# Altium PCB USB_UART.PcbDoc
Units mil, origin at the board's own origin, x right, y up, seen from the top; angles counter-clockwise.
Board outline 1133.28 x 826.77 mil, 2 copper layers (Top Layer, Bottom Layer), stack 41.339 mil thick; 7 components, 7 nets, 38 pads, 6 vias.
Unrouted connection lines stored in the file: 1.
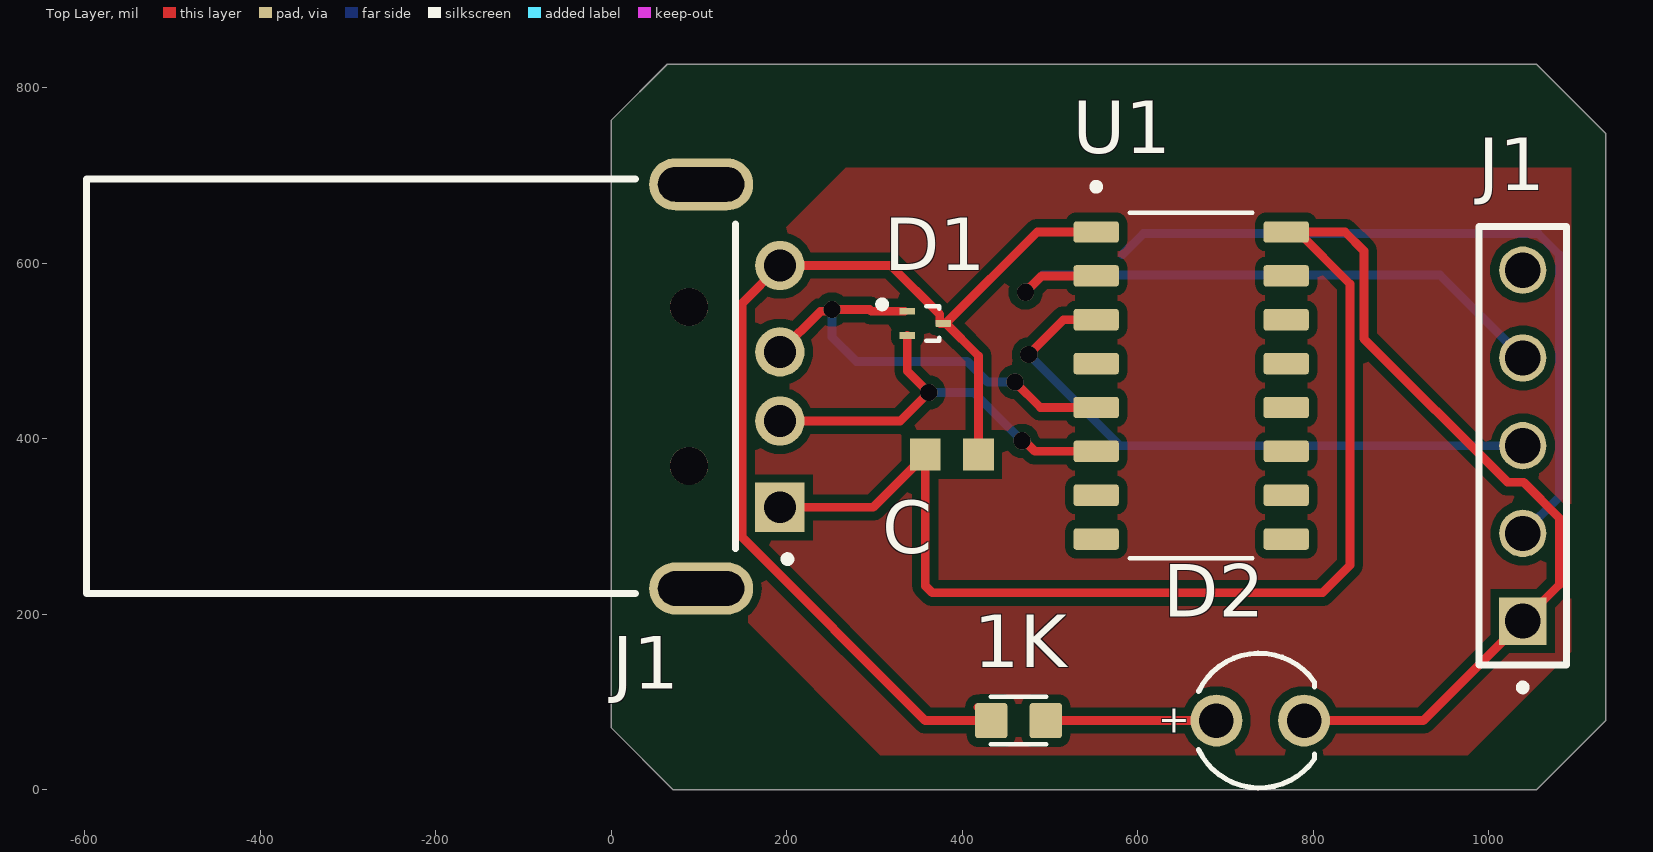
[diagram p0: Top Layer view]
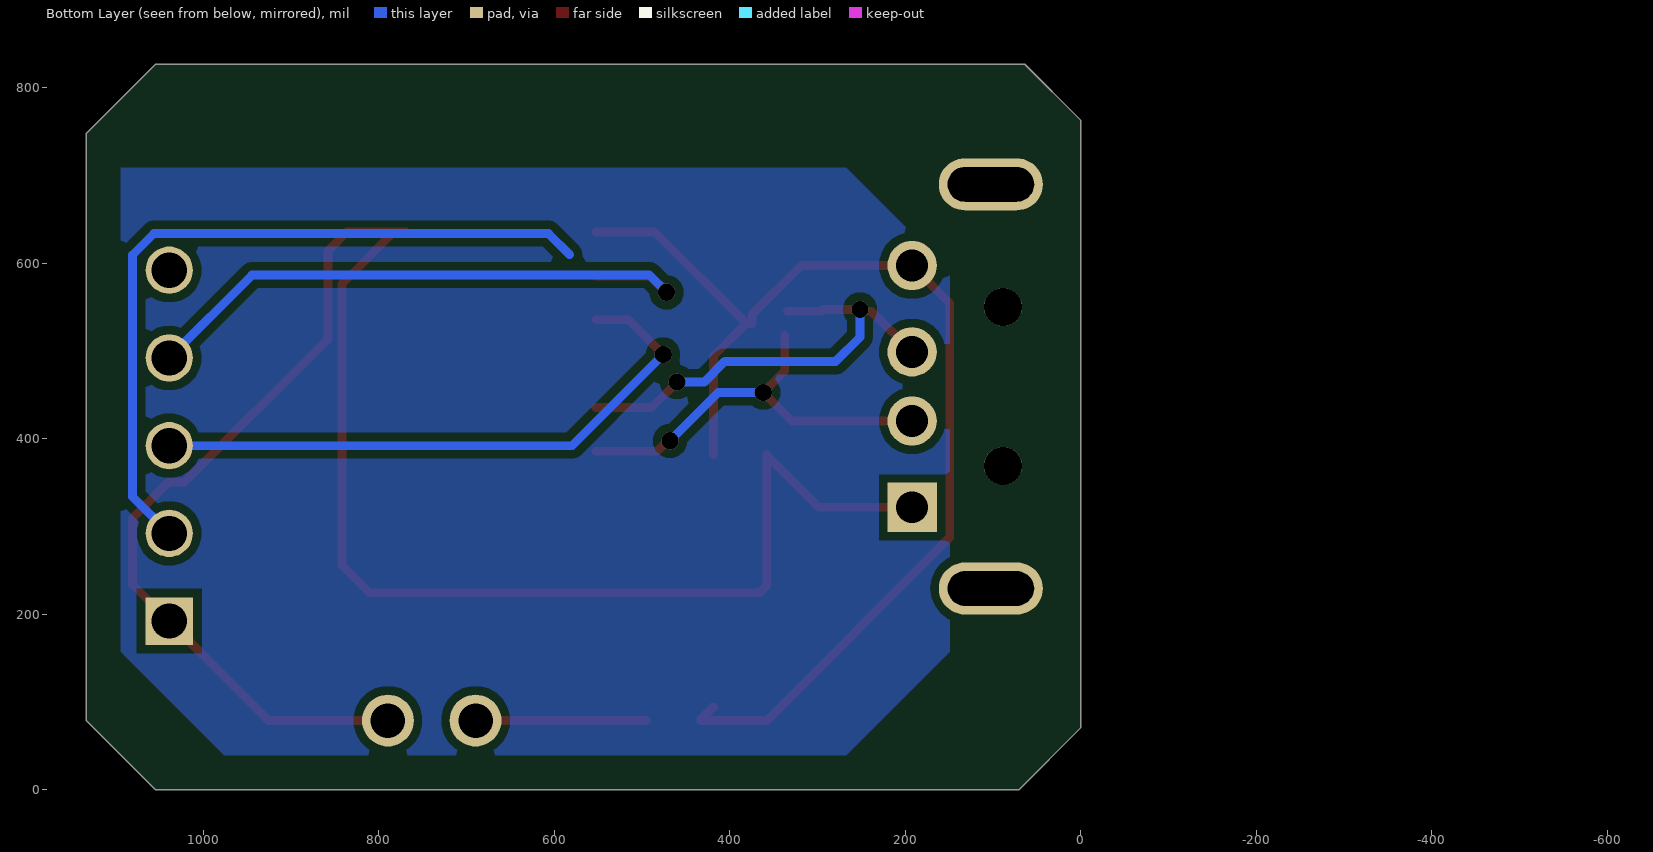
[diagram p1: Bottom Layer view, seen from below]

## Layer stack, top to bottom
Top Solder: solder mask 1.9685, Solder Resist, Dk 3.5
Top Layer: signal copper 3.937
Dielectric 1: dielectric 33.4646, FR-4, Dk 4.8
Bottom Layer: signal copper 3.937
Bottom Solder: solder mask 1.9685, Solder Resist, Dk 3.5

## Board outline
70.48,0 1054.73,0 1133.47,78.74 1133.47,748.03 1054.73,826.77 63.77,826.77 0.19,763.19 0.19,70.29

## Design rules (kind name [scope] priority, off if disabled: settings)
Clearance [All] p1: gap=9.84 ignorepadtopadclearanceinfootprint=FALSE
HoleSize [All] p1: absolutevalues=TRUE maxlimit=100 minlimit=10 maxpercent=80.000 minpercent=20.000
PolygonConnect [All] p1: connectstyle=Relief reliefconductorwidth=10 reliefentries=4 polygonreliefangle="90 Angle" airgapwidth=10
RoutingVias [All] p1: holewidth=19.68 width=19.68 viastyle="Through Hole" minholewidth=19.68 minwidth=19.68 maxholewidth=19.68 maxwidth=19.68
SolderMaskExpansion [All] p1: expansion=4 istentingtop=FALSE
Width Width_1 [All] p1: maxlimit=10 minlimit=6 preferedwidth=10 minimp=50.000000 maximp=50.000000 favimp=50.000000
Width Data_line [(InNet('D+') OR InNet('D-'))] p2: maxlimit=8 minlimit=6 preferedwidth=8 minimp=50.000000 maximp=50.000000 favimp=50.000000
29 further rules are at their usual default settings.

## Components (designator, comment, footprint, x,y, rotation, side; value= is the part's Value field where it differs from the comment)
1K "4-2176243-5" RESC1608X50N 464.18,78.74 r0 top
C "GRM188R71C104KA01D" CAPC1608X90N 388.2,381.89 r180 top
D1 "TPD2EUSB30DRTR" SOTFL35P100X50-3N 357.88,531.5 r0 top
D2 "Blue, 2.8V, 30°" WL-TMRW_D3.9H10.5 739.77,78.74 r0 top
J1 "USB-AM-S-X-X-TH" SAMTEC_USB-AM-S-X-X-TH 102.43,459.63 r270 top
J1 "5 Pin Header" SAMTEC_TSW-105-06-L-S 1038.98,192.13 r90 top
U1 "CH340C" SOIC127P600X180-16N 661.03,460.63 r0 top

## Footprints (in the part's own frame and the unit in brackets; to place one, negate y for a bottom-side part, rotate by r counter-clockwise, add the part's x,y. Pads: shape width x height; smd on the part's side, far side on the other; paste and mask are expansions set on the pad)
CAPC1608X90N [mm]
  rect 0.89x0.93 smd: 1(-0.77,0) 2(0.77,0)
RESC1608X50N [mm]
  rrect20% 0.94x1.02 smd: 1(-0.79,0) 2(0.79,0)
  silkscreen extent -0.8,-0.69 0.8,0.69
SAMTEC_TSW-105-06-L-S [mm]
  rect 1.37x1.37 hole 1.02: 01(0,0)
  round 1.37 hole 1.02: 02(2.54,0) 03(5.08,0) 04(7.62,0) 05(10.16,0)
  silkscreen extent -2.02,-1.27 11.43,1.27
SAMTEC_USB-AM-S-X-X-TH [mm]
  rect 1.428x1.428 / inner round 1.428 / far side rect 1.428x1.428 hole 0.92: 01(3.5,2.28)
  round 1.428 hole 0.92: 02(1,2.28) 03(-1,2.28) 04(-3.5,2.28)
  oval 1.508x3.016 hole 1 slot 2.5 at 90 deg: S1(-5.85,0) S2(5.85,0)
  round 1.1 hole 1.1 unplated: ""(-2.3,-0.35) ""(2.3,-0.35)
  silkscreen extent -6,-17.8 6,2.6
SOIC127P600X180-16N [mm]
  rrect25% 1.31x0.62 smd: 1(-2.75,4.445) 2(-2.75,3.175) 3(-2.75,1.905) 4(-2.75,0.635) 5(-2.75,-0.635) 6(-2.75,-1.905) 7(-2.75,-3.175) 8(-2.75,-4.445) 9(2.75,-4.445) 10(2.75,-3.175) 11(2.75,-1.905) 12(2.75,-0.635) 13(2.75,0.635) 14(2.75,1.905) 15(2.75,3.175) 16(2.75,4.445)
  silkscreen extent -2.85,-5 1.78,5.85, body extent -3,-5 3,5, height 1.8
SOTFL35P100X50-3N [mm]
  rrect25% 0.46x0.2 smd: 1(-0.52,0.35) 2(-0.52,-0.35) 3(0.52,0)
  silkscreen extent -1.35,-0.5 0.4,0.65
WL-TMRW_D3.9H10.5 [mm] "THT Mono-color Round LED, 2-leads"
  round 1.5 hole 1: 1(1.27,0) 2(-1.27,0)
  silkscreen extent -1.79,-1.95 1.57,1.95, body extent -1.97,-1.95 1.85,1.95, height 10.55

## Part data
1K: "CRGS0603J4K7 - Each", Package=None, Availability=Unavailable, MP=4-2176243-5, Price=None
C: "SMD Capacitor X7R_EIA_ with Capacitance: 0.10uF Tol. 10%. Rated Voltage: 16Vdc", Package="1608 Murata", Availability=Unavailable, MF=Murata, MP=GRM188R71C104KA01D, Price=None, SnapEDA_Link=https://www.snapeda.com/parts/GRM188R71C104KA01D/Murata%20Electronics%20North%20America/view-part/12287/?ref=snap
D1: Package="SOT-9X3-3 Texas Instruments", Availability=Warning, Check_prices=a, MF="Texas Instruments", MP=TPD2EUSB30DRTR, Price=None, Purchase-URL=https://pricing.snapeda.com/search/part/TPD2EUSB30DRTR/?ref=eda, SnapEDA_Link=https://www.snapeda.com/parts/TPD2EUSB30DRTR/Texas%20Instruments/view-part/189118/?ref=snap
D2: library part 151033BS03000, "WL-TMRW Mono-color Round Waterclear, THT, D3.9 x H10.5mm, Blue, 2.8V, 30°", Emitting Color=Blue, Forward Voltage=2.8V, Manufacturer="Wurth Elektronik", Operating Temperature Max=85°C, Operating Temperature Min=-40°C, Category="Signal LEDs", Chip Technology=InGaN, ComponentLink1Description="Website Link", ComponentLink1URL=https://www.we-online.com/redexpert/article/151033BS03000?ad, ComponentLink2Description="Datasheet Link", ComponentLink2URL=https://www.we-online.com/redexpert/spec/151033BS03000?ad, Diameter=3.9mm, Dominant Wavelength=470nm, Height=10.5mm, Luminous Intensity=3800mcd, Manufacturer Part Number=151033BS03000, Match Code=WL-TMRW, Mount="Through Hole", Packaging=Bulk, Peak Wavelength=465nm, Viewing Angle=30°
J1: "USB Connectors USB 2.0 Interface, Type A", Package=None, Availability="In Stock", Check_prices=https://www.snapeda.com/parts/USB-AM-S-S-W-TH/Samtec/view-part/?ref=eda, MF=Samtec, MP=USB-AM-S-S-W-TH, Price=None, Purchase-URL=https://pricing.snapeda.com/search/part/USB-AM-S-S-W-TH/?ref=eda, SnapEDA_Link=https://www.snapeda.com/parts/USB-AM-S-S-W-TH/Samtec/view-part/?ref=snap
J1: library part TSW-105-06-L-S, Package=None, Availability=Unavailable, MP=TSW-105-06-L-S, Price=None
U1: "USB to serial chip CH340", Package=None, Availability="Not in stock", Check_prices=https://www.snapeda.com/parts/CH340C/WCH/view-part/?ref=eda, MF=WCH, MP=CH340C, Price=None, SnapEDA_Link=https://www.snapeda.com/parts/CH340C/WCH/view-part/?ref=snap

## Via types
v1: diameter 19.68, hole 19.68, Top Layer to Bottom Layer, 6 vias

## Nets (pads, with @x,y where several pads share a name; then routed paths per layer and width w, separated by ;. In a path a pad name is that pad's centre, name@x,y a point inside that pad or via, vN(x,y) a via of type N, cw(c..) or ccw(c..) an arc to the next point about the centre after c; other vN are vias at no path point)
D+: D1.1 J1.03@192.19,499 U1.5 | length 528.9
  Top Layer w10: J1.03@192.19,499 238.58,545.39 249.73,545.39 v1(251.58,547.24) 294.25,547.24 296.22,545.28 D1.1@334.42,545.28 ; v1(460.24,464.57) 489.18,435.63 U1.5
  Bottom Layer w10: v1(251.58,547.24) 251.58,515.75 279.14,488.19 405.63,488.19 429.25,464.57 v1(460.24,464.57)
D-: D1.2 J1.02@192.19,420.26 U1.6 | length 476.9
  Top Layer w10: J1.02@192.19,420.26 329.32,420.26 v1(361.82,452.76) 337.41,477.17 D1.2 ; v1(468.12,397.64) 470.74,397.64 482.75,385.63 U1.6
  Bottom Layer w10: v1(361.82,452.76) 413,452.76 v1(468.12,397.64)
GND: 1K.1 C.1 D1.3 J1.02@1038.98,292.13 J1.04@192.19,597.43 U1.1 | length 2174.6
  Top Layer w10: 1K.1@418,93.82 419.57,93.82 433.08,80.32 1K.1 358.07,78.74 149.24,287.58 149.24,554.47 192.19,597.43 318.67,597.43 374.3,541.79 374.3,532.56 375.36,531.5 D1.3 D1.3@381.35,531.5 ; C.1 418.51,494.33 D1.3@381.35,531.5 ; U1.1 485.48,635.63 D1.3@381.35,531.5
  Bottom Layer w10: 582.62,609.76 606.79,633.94 1056.3,633.94 1080.8,609.44 1080.8,333.94 J1.02@1038.98,292.13
Net1K_2: 1K.2 D2.2 | length 194.5
  Top Layer w10: 1K.2 D2.2
RXD: J1.03@1038.98,392.13 U1.3 | length 699.2
  Top Layer w10: v1(475.99,496.06) 515.56,535.63 U1.3
  Bottom Layer w10: v1(475.99,496.06) 579.93,392.13 J1.03@1038.98,392.13
TXD: J1.04@1038.98,492.13 U1.2 | length 702.7
  Top Layer w10: v1(472.06,566.93) 490.76,585.63 U1.2
  Bottom Layer w10: v1(472.06,566.93) 491.74,586.61 944.5,586.61 J1.04@1038.98,492.13
Vcc: C.2 D2.1 J1.01 U1.16 | length 2180.7
  Top Layer w10: J1.01@192.19,321.83 298.61,321.83 C.2@357.88,381.1 ; C.2 C.2@357.88,381.1 ; U1.16 U1.16@782.88,635.63 ; D2.1 925.6,78.74 1038.98,192.13 1080.8,233.94 1080.8,309.44 1039.92,350.32 1021.67,350.32 857.88,514.1 857.88,614.17 836.43,635.63 U1.16@782.88,635.63 ; C.2@357.88,381.1 357.88,232.28 365.76,224.41 810.64,224.41 842.13,255.91 842.13,576.38 U1.16@782.88,635.63
pads on no net: J1. J1.05 J1.S1 J1.S2 U1.4 U1.7 U1.8 U1.9 U1.10 U1.11 U1.12 U1.13 U1.14 U1.15

## Polygon pours and split planes (outlines as drawn)
no net on Top Layer "NONET_L01_P001" (solid, pour order 1): 267.33,708.66 149.22,590.55 149.22,196.85 306.7,39.37 975.99,39.37 1094.1,157.48 1094.1,708.66
no net on Bottom Layer "NONET_L02_P002" (solid, pour order 2): 267.33,708.66 149.22,590.55 149.22,157.48 267.33,39.37 975.99,39.37 1094.1,157.48 1094.1,708.66

## Text inside footprints (layer, text, board x,y; h text height)
D2: Top Overlay "+" at 623.63,64.96 h31.5